# Altium PCB TorpedoSOMDevBoard_v1.1.PcbDoc
Units mil, origin at the board's own origin, x right, y up, seen from the top; angles counter-clockwise.
Board outline 2391 x 3350 mil, 4 copper layers (LT, GND_Plane, POWER, LB), stack 57.51 mil thick; 45 components, 102 nets, 382 pads, 166 vias.
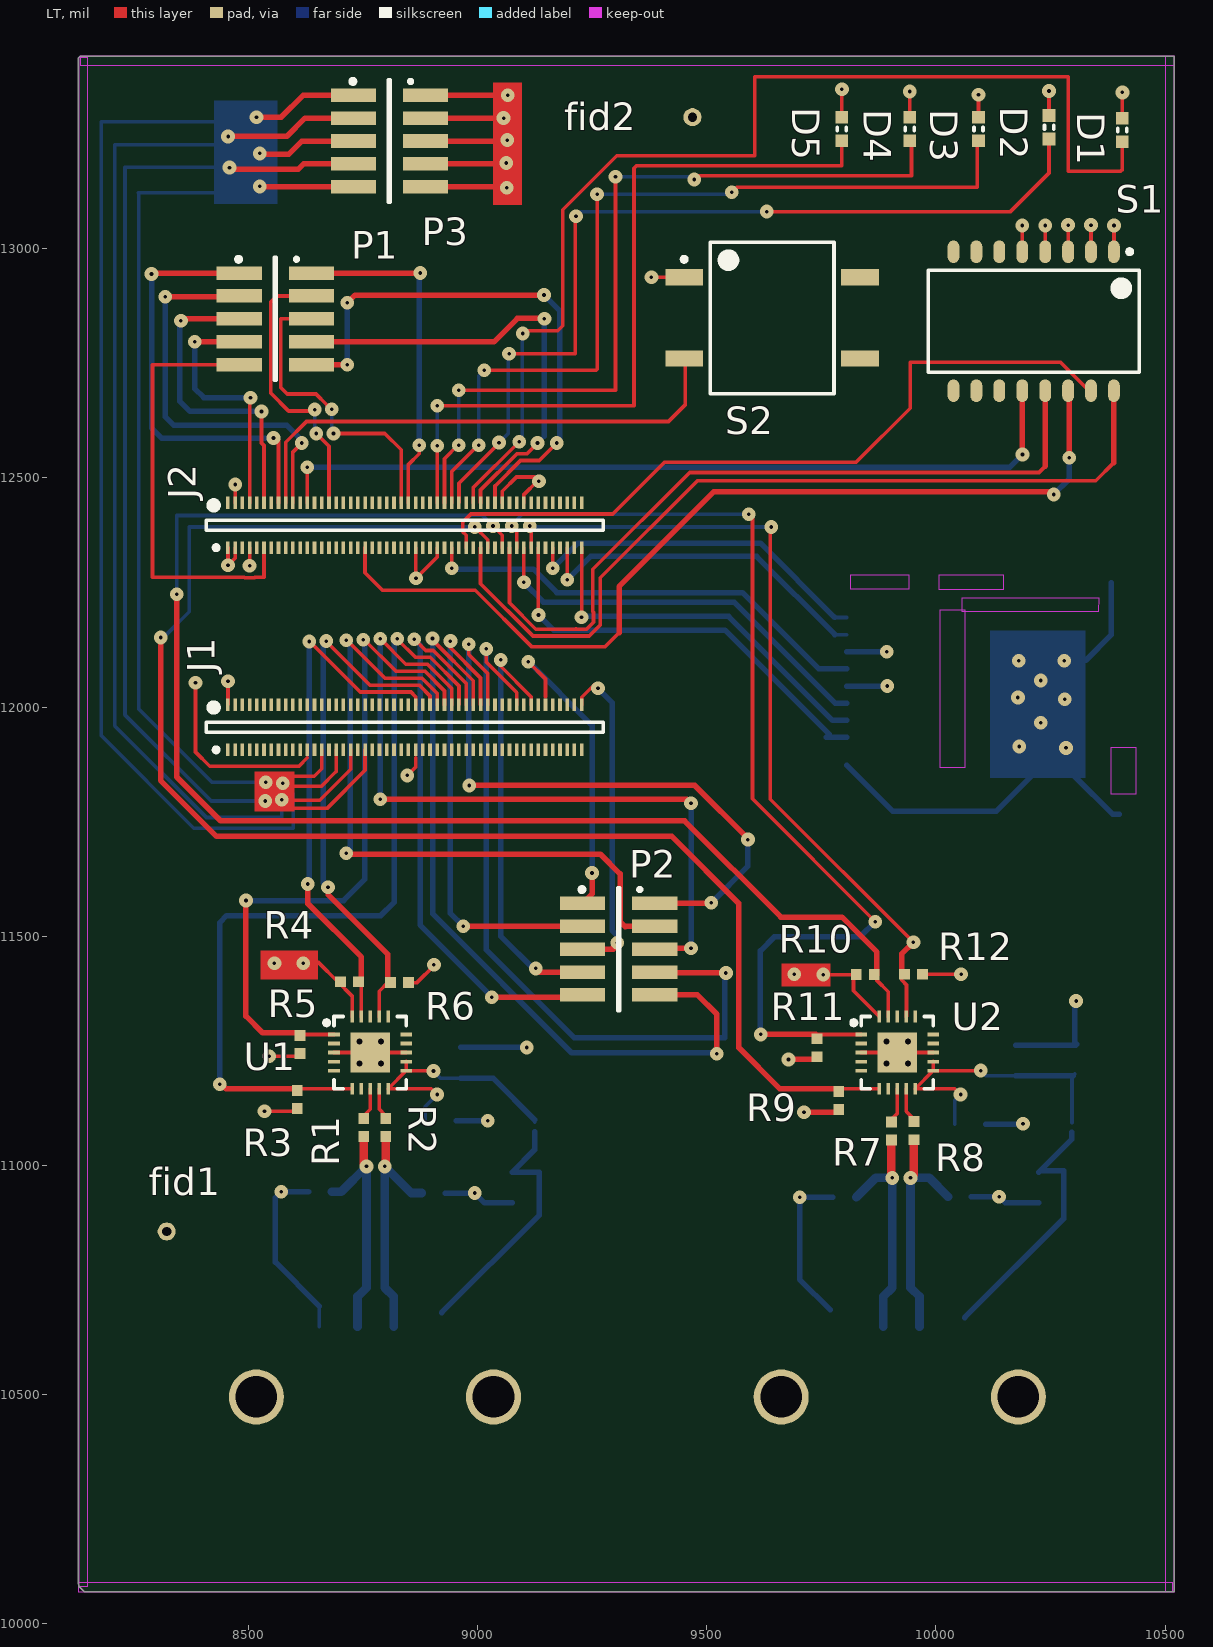
[diagram p0: LT view]
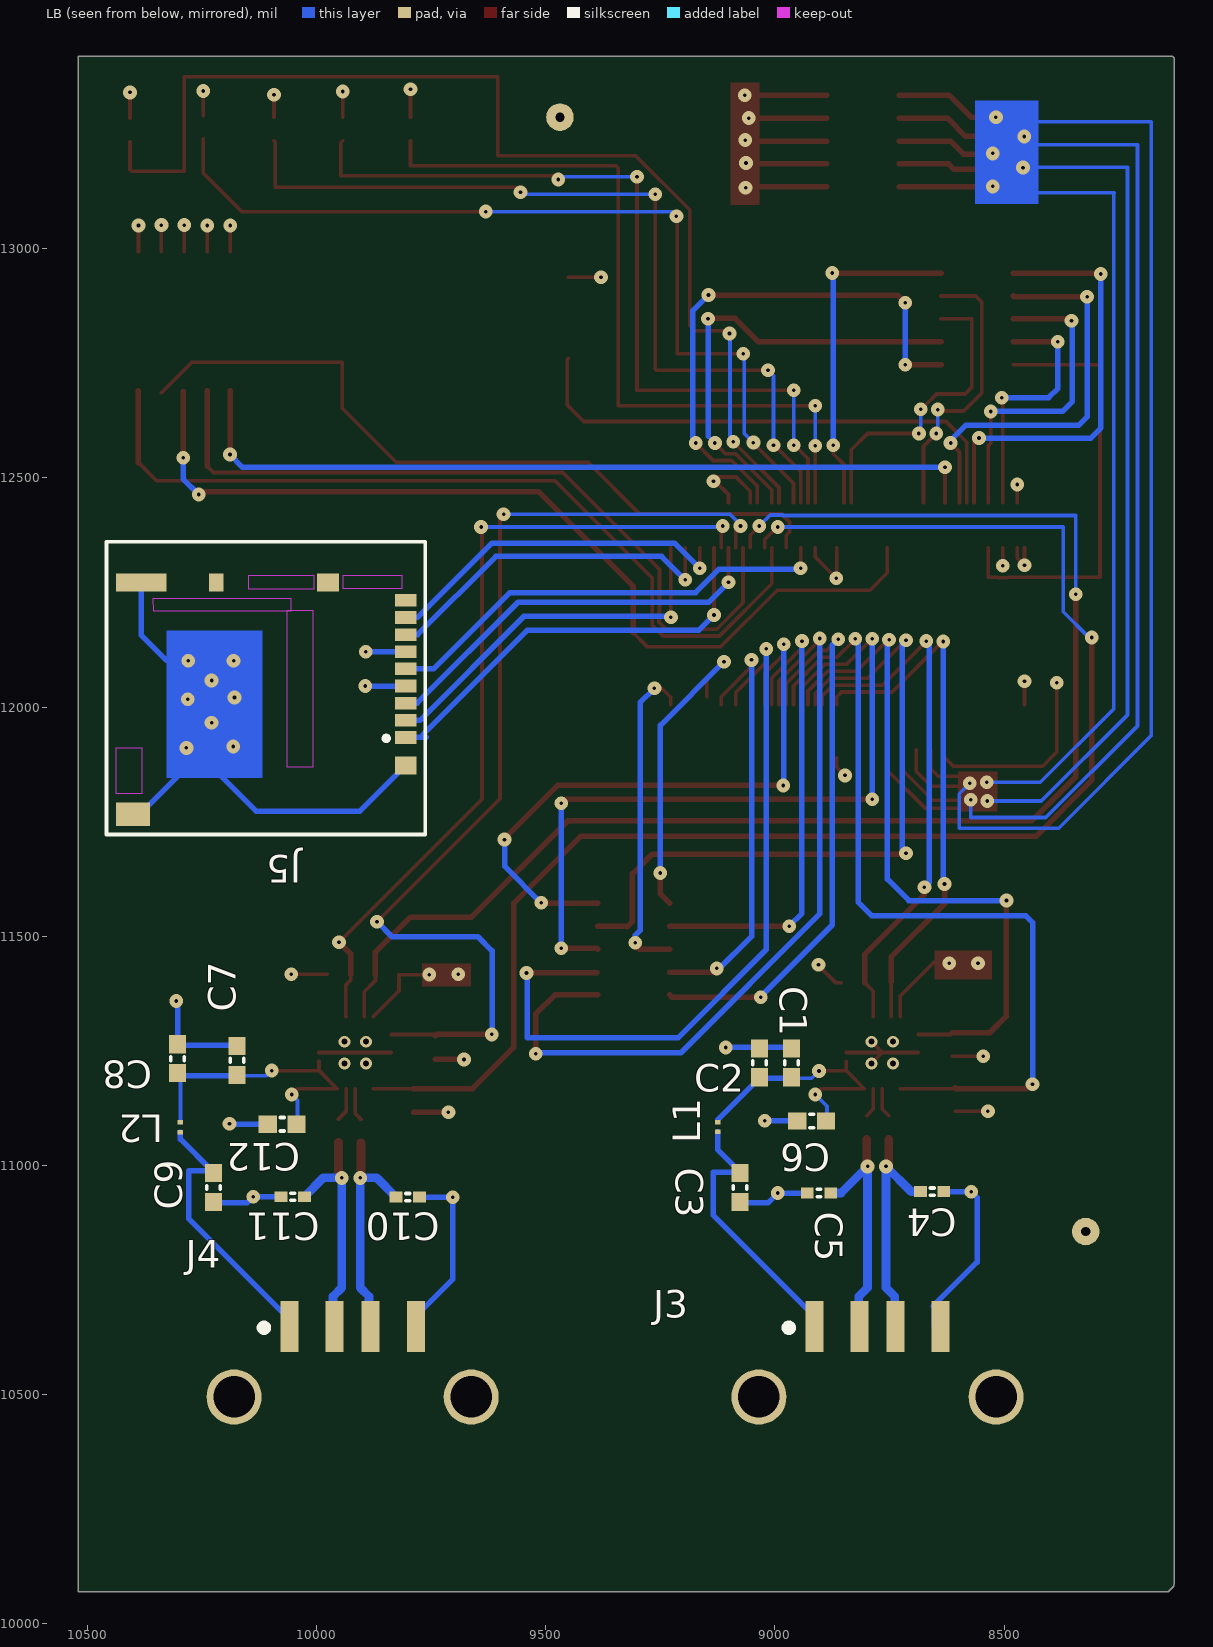
[diagram p1: LB view, seen from below]
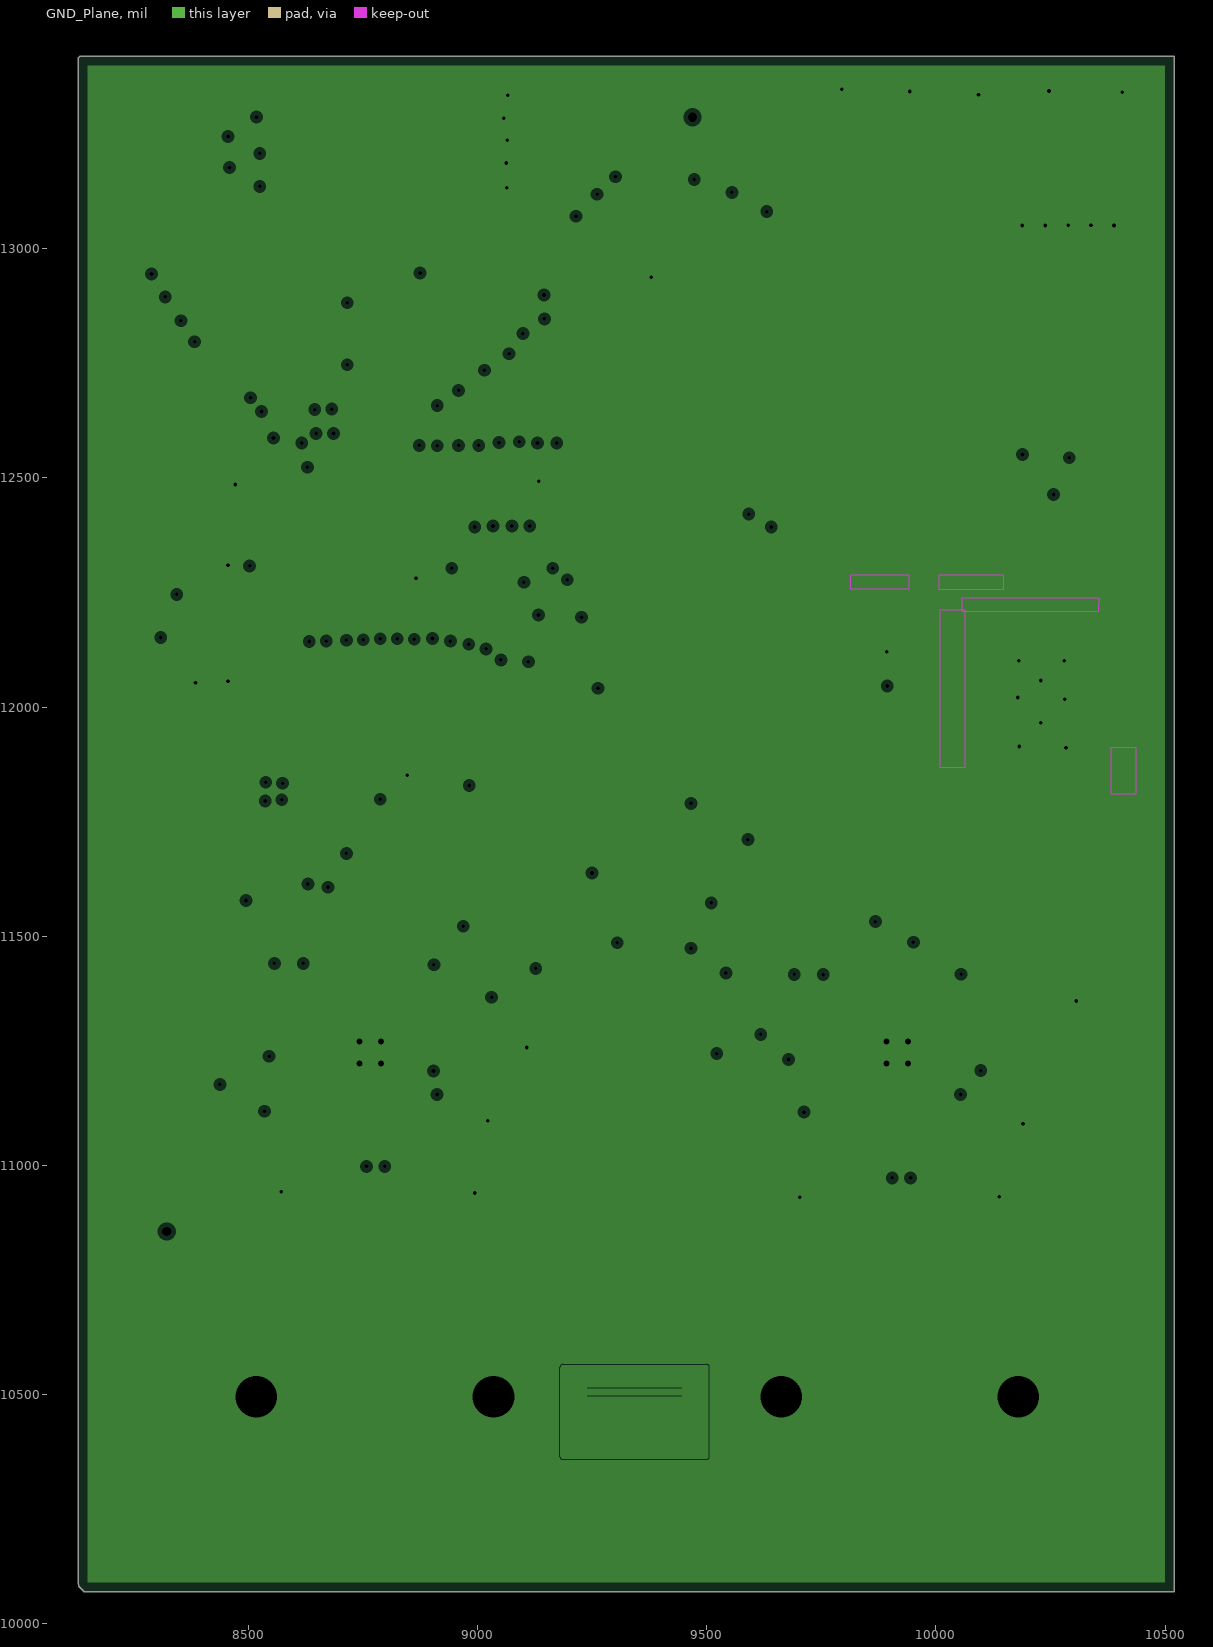
[diagram p2: GND_Plane, clearances drawn from the general rule]
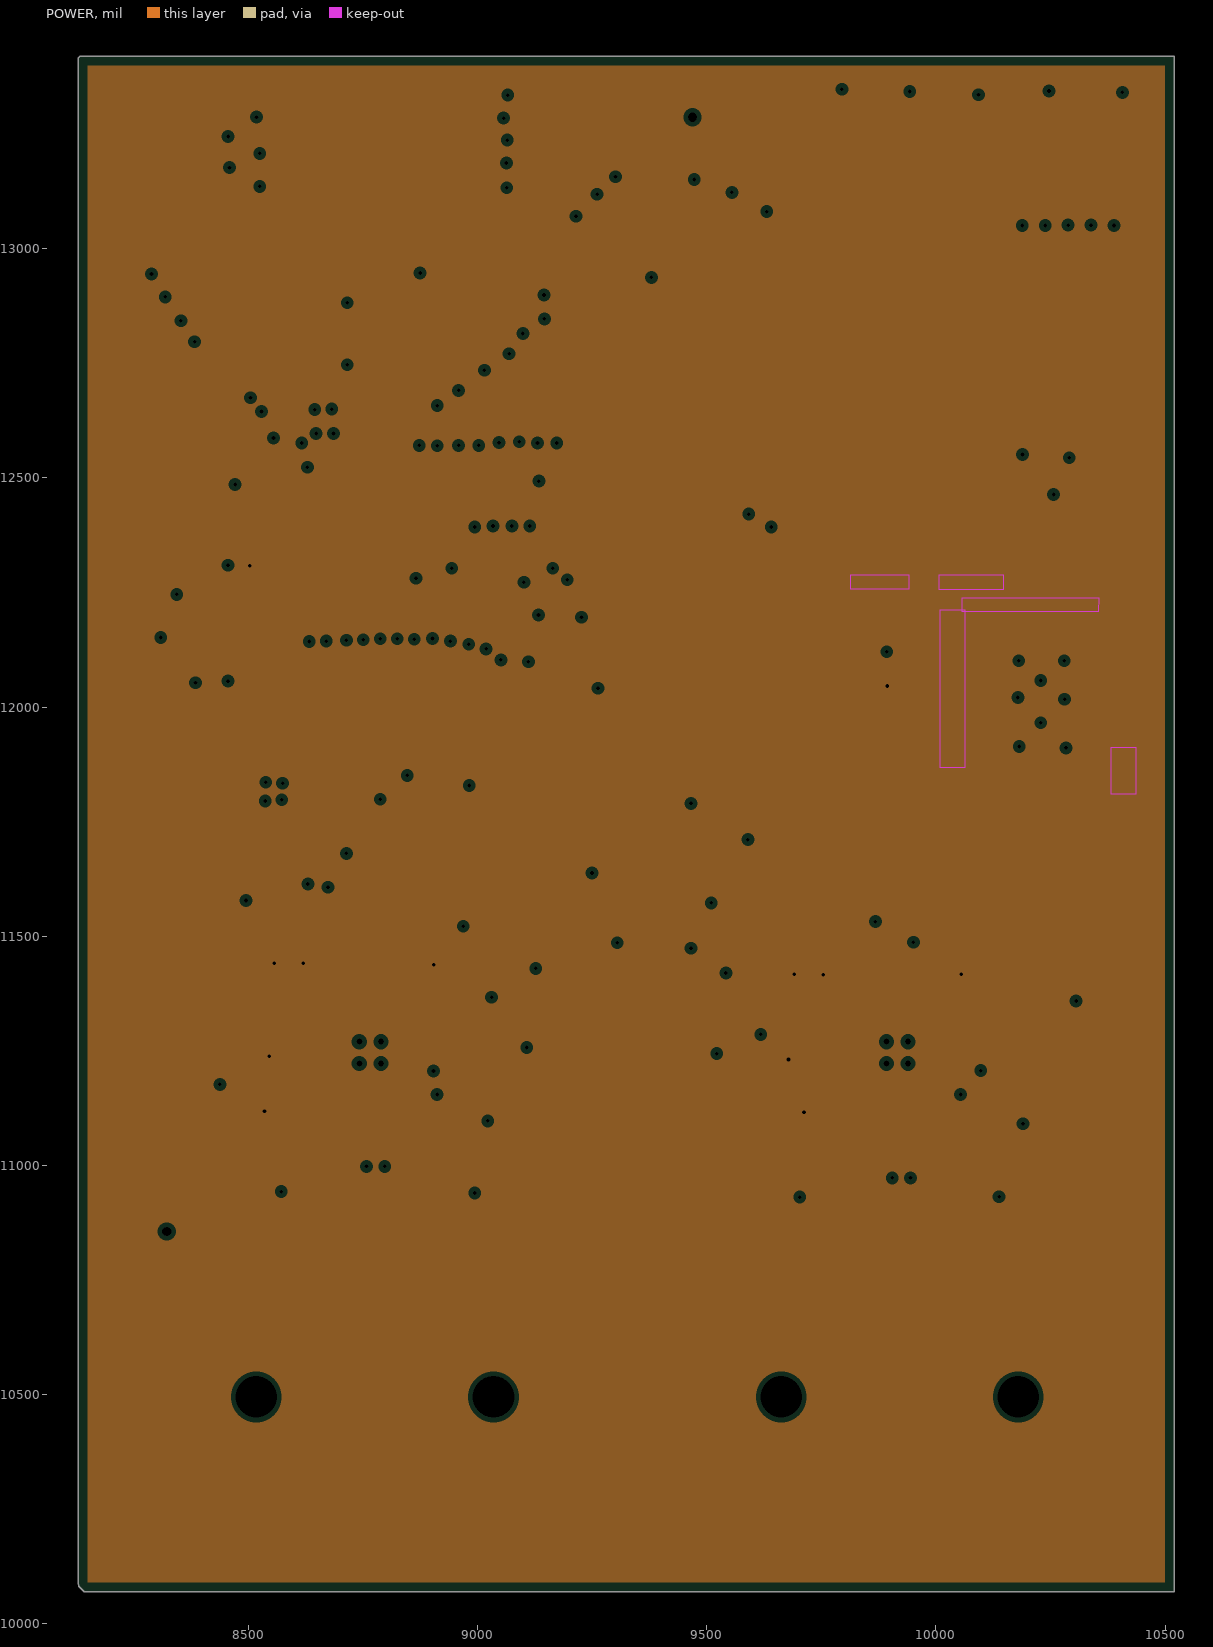
[diagram p3: POWER, clearances drawn from the general rule]

## Layer stack, top to bottom
LT: signal copper 0.59
Dielectric: core 9.37, FR-4, Dk 4.8
GND_Plane: plane copper 15.35, net D_GND
Dielectric: prepreg 6.89, FR-4, Dk 4.8
POWER: plane copper 15.35, net VIO_REF_1V8
Dielectric: core 9.37, FR-4, Dk 4.8
LB: signal copper 0.59

## Board outline
8130,10082 8142,10070 10500,10070 10520,10070 10520,13420 8133,13420 8130,13417 8129,13416 8129,10090

## Design rules (kind name [scope] priority, off if disabled: settings)
AssemblyTestPointUsage [All] p1: valid=2
AssemblyTestpoint [All] p1: testpointundercomponent=TRUE minsize=40 maxsize=130 preferedsize=60 minholesize=0 maxholesize=100 preferedholesize=32 testpointgrid=1 usegrid=TRUE gridtolerance=0.01 allowsidetop=TRUE allowsidebottom=TRUE
Clearance [All] p1: gap=7
DiffPairsRouting [All] p1: maxlimit=10 minlimit=10 mostfreqgap=10 maxuncoupledlength=500
FabricationTestPointUsage [All] p1: valid=0 allowmultiple=TRUE
FabricationTestpoint [All] p1: side=3 testpointundercomponent=TRUE minsize=40 maxsize=130 preferedsize=60 minholesize=0 maxholesize=100 preferedholesize=32 testpointgrid=1 allowsidetop=TRUE allowsidebottom=TRUE usegrid=TRUE gridtolerance=0.01
HoleSize [All] p1: absolutevalues=TRUE maxlimit=100 minlimit=6 maxpercent=80.000 minpercent=20.000
MinimumSolderMaskSliver [All] p1: minsoldermaskwidth=0
PlaneClearance [All] p1: clearance=10
PlaneConnect [All] p1: planeconnectstyle=Direct reliefexpansion=20 reliefentries=4 reliefconductorwidth=15 reliefairgap=10
PolygonConnect [All] p1: connectstyle=Relief reliefconductorwidth=15 reliefentries=4 polygonreliefangle="90 Angle" airgapwidth=10
RoutingVias [All] p1: holewidth=8 width=26 viastyle="Through Hole" minholewidth=6 minwidth=22 maxholewidth=100 maxwidth=130
SilkscreenOverComponentPads [All] p1: minsilkscreentomaskgap=2
SolderMaskExpansion [All] p1: expansion=4
Width Width_1 [All] p1: maxlimit=125 minlimit=8 preferedwidth=12
Width [(InDifferentialPairClass('All Differential Pairs'))] p2: maxlimit=125 minlimit=8 preferedwidth=19
18 further rules are at their usual default settings.

## Classes and differential pairs
component class Fiducials: fid1 fid2
component class USB_UART_Convertors: C1 C2 C3 C4 C5 C6 C7 C8 C9 C10 C11 C12 J3 J4 L1 L2 R1 R2 R3 R4 R5 R6 R7 R8 R9 R10 R11 R12 U1 U2
component class TorpedoSOM_ReceptorS: J1 J2
component class SOM_Resets_BootConfig: S1 S2
component class SD_CARD: J5
component class Onboard_LEDs: D1 D2 D3 D4 D5
component class IO_Connectors: P1 P2 P3
differential pair USB2_D: +USB2_D_P -USB2_D_N
differential pair USB1_D: +USB1_D_P -USB1_D_N

## Components (designator, comment, footprint, x,y, rotation, side; value= is the part's Value field where it differs from the comment)
C1 "C0603" CAP_CER_0603_KEMET 8964,11224 r270 bottom
C2 "C0603" CAP_CER_0603_KEMET 9034,11224 r270 bottom
C3 "C0603" CAP_CER_0603_KEMET 9076,10952 r90 bottom
C4 "C0402" CAP_CER_0402_KEMET 8657,10943 r0 bottom
C5 "C0402" CAP_CER_0402_KEMET 8904,10940 r180 bottom
C6 "C0603" CAP_CER_0603_KEMET 8919.87,11097.4 r180 bottom
C7 "C0603" CAP_CER_0603_KEMET 10173.87,11229.4 r270 bottom
C8 "C0603" CAP_CER_0603_KEMET 10303,11233 r270 bottom
C9 "C0603" CAP_CER_0603_KEMET 10225,10952 r90 bottom
C10 "C0402" CAP_CER_0402_KEMET 9801,10931 r0 bottom
C11 "C0402" CAP_CER_0402_KEMET 10052,10932 r180 bottom
C12 "C0603" CAP_CER_0603_KEMET 10075,11090 r180 bottom
D1 "LED0" LEDCP1006X02N 10407,13259 r90 top
D2 "LED1" LEDCP1006X02N 10247,13265 r90 top
D3 "LED2" LEDCP1006X02N 10093,13261 r90 top
D4 "LED3" LEDCP1006X02N 9943,13261 r90 top
D5 "LED4" LEDCP1006X02N 9795,13261 r90 top
fid1 "Fiducial-1mm" FIDUCIAL_1MM 8322,10856 r90 top
fid2 "Fiducial-1mm" FIDUCIAL_1MM 9469,13287 r90 top
J1 "Connector 100" SOP127P600-8N_100PinConnRecptr_Hirose 8841.46,11956.07 r90 top
J2 "Connector 100" SOP127P600-8N_100PinConnRecptr_Hirose 8841.46,12396.99 r90 top
J3 "USBConn_Assman_AuY1006R" USBConn_Assman_AuY1006R 9035,10495 r180 bottom
J4 "USBConn_Assman_AuY1006R" USBConn_Assman_AuY1006R 10180,10495 r180 bottom
J5 "Hirose_MicroSD_DM3ATSFPEJM5" "SD_Card_Hirose_DM3 AT_SF_PEJM5" 10105,12046 r270 bottom
L1 "FerriteBead_MMZ0603Y152B" Chip2PinSM127P600-8N_FerriteBead_TDK 9125,11084 r90 bottom
L2 "FerriteBead_MMZ0603Y152B" Chip2PinSM127P600-8N_FerriteBead_TDK 10297,11083 r90 bottom
P1 "SOP127P600-8N_Header_10PIN_Harwin" SOP127P600-8N_Header_10PIN_Harwin 8559,12847 r0 top
P2 "SOP127P600-8N_Header_10PIN_Harwin" SOP127P600-8N_Header_10PIN_Harwin 9308,11472 r0 top
P3 "SOP127P600-8N_Header_10PIN_Harwin" SOP127P600-8N_Header_10PIN_Harwin 8808,13235 r0 top
R1 "27R" RES_CHIP_0402 8752,11083 r270 top
R2 "27R" RES_CHIP_0402 8800,11083 r270 top
R3 "10K" RES_CHIP_0402 8607,11144 r270 top
R4 "10K" RES_CHIP_0402 8721,11401 r180 top
R5 "10K" RES_CHIP_0402 8613,11264 r270 top
R6 "10K" RES_CHIP_0402 8830,11399 r0 top
R7 "27R" RES_CHIP_0402 9903,11075 r270 top
R8 "27R" RES_CHIP_0402 9952,11076 r270 top
R9 "10K" RES_CHIP_0402 9788,11142 r270 top
R10 "10K" RES_CHIP_0402 9845.87,11416.4 r180 top
R11 "10K" RES_CHIP_0402 9741,11257 r270 top
R12 "10K" RES_CHIP_0402 9951,11417.12 r0 top
S1 "DipSwitch_Copal_CHS-08TB" SOP127P800X250-16N_DIP_SWITCH_COPAL 10213.51,12841.87 r270 top
S2 "CnK_PushButton_1.14100.5030000" SOP127P600-8N_PushButtonRacon8 9643,12849 r0 top
U1 "FT231X" QFN127P600-8N_FTDI_20PIN 8765.87,11246.4 r0 top
U2 "FT231X" QFN127P600-8N_FTDI_20PIN 9915.87,11246.4 r0 top

## Footprints (in the part's own frame and the unit in brackets; to place one, negate y for a bottom-side part, rotate by r counter-clockwise, add the part's x,y. Pads: shape width x height; smd on the part's side, far side on the other; paste and mask are expansions set on the pad)
CAP_CER_0402_KEMET [mm] "Chip Capacitor, 2-Leads, Body 1.0x0.5mm, IPC Medium Density"
  rect 0.7x0.6 smd: 1(-0.65,0) 2(0.65,0)
  silkscreen extent -0.1,-0.2 0.1,0.2, body extent -0.5,-0.25 0.5,0.25, height 0.5
CAP_CER_0603_KEMET [mm]
  rect 1x0.95 smd: 1(-0.8,0) 2(0.8,0)
  silkscreen extent -0.1,-0.38 0.1,0.38, body extent -0.81,-0.4 0.79,0.4, height 0.3
Chip2PinSM127P600-8N_FerriteBead_TDK [mm] "Chip2PinSM127P600-8N_FerriteBead_TDK"
  rect 0.25x0.3 smd: 1(-0.275,0) 2(0.275,0)
  body extent -0.32,-0.17 0.31,0.17, height 0.2
FIDUCIAL_1MM [mm] "1mm Fiducial"
  round 1 / inner round 1.524 / far side round 1.524 hole 0.508 paste-1 mask+0.5: 1(0,0)
  body extent -0.5,-0.5 0.5,0.5, height 0.02
LEDCP1006X02N [mm] "LEDCP1006X02N_Chip LED, 2-Leads, Body 1.0x0.6mm, IPC Medium Density"
  rect 0.7x0.7 smd: 1(-0.65,0) 2(0.65,0)
  silkscreen extent -0.1,-0.25 0.1,0.25, body extent -0.5,-0.3 0.5,0.3, height 0.2
QFN127P600-8N_FTDI_20PIN [mm] "QFN127P600-8N_FTDI_20PIN"
  rect 0.65x0.2 smd: 1(-2,1) 2(-2,0.5) 3(-2,0) 4(-2,-0.5) 5(-2,-1) 11(2,-1) 12(2,-0.5) 13(2,0) 14(2,0.5) 15(2,1)
  rect 0.2x0.65 smd: 6(-1,-2) 7(-0.5,-2) 8(0,-2) 9(0.5,-2) 10(1,-2) 16(1,2) 17(0.5,2) 18(0,2) 19(-0.5,2) 20(-1,2)
  rect 2.2x2.2 smd: 21(0,0)
  silkscreen extent -2.54,-2 2,2, body extent -2,-2 2,2, height 0.8
RES_CHIP_0402 [mm] "Chip Resistor, Body 1.1x0.5mm, IPC High Density"
  rect 0.6x0.6 smd: 1(-0.5,0) 2(0.5,0)
  body extent -0.5,-0.25 0.5,0.25, height 0.35
"SD_Card_Hirose_DM3 AT_SF_PEJM5" [mm]
  rect 0.7x1.2 smd: 1(2.85,7.6) 2(1.9,7.6) 3(0.95,7.6) 4(0,7.6) 5(-0.95,7.6) 6(-1.9,7.6) 7(-2.85,7.6) 8(-3.8,7.6) ""(-4.75,7.6)
  rect 1x2.8 smd: 6(-5.725,-7.05)
  rect 1.3x1.9 smd: 6(7.1,-7.5)
  rect 1x1.2 smd: 9(4.4,7.6) ""(-5.725,3.3)
  rect 1x0.8 smd: ""(-5.725,-2.9)
  Keep-Out Layer region: 3.425,-7.025 5.975,-7.025 5.975,-8.425 3.425,-8.425
  Keep-Out Layer region: -4.2,2.457 4.5,2.443 4.5,1.043 -4.2,1.043
  Keep-Out Layer region: -4.85,-6.388 -4.85,1.238 -4.15,1.238 -4.15,-6.362
  Keep-Out Layer region: -6.125,-1.1 -6.125,2.5 -5.375,2.5 -5.375,-1.1
  Keep-Out Layer region: -6.15,4.15 -6.15,7.4 -5.4,7.4 -5.4,4.15
  silkscreen extent -8,-8.98 8.23,8.7, body extent -8.45,-9.43 8.6,9, height 1.72
SOP127P600-8N_100PinConnRecptr_Hirose [mm] "SOP127P600-8N_100PinConnRecptr_Hirose"
  rect 0.7x0.2 smd: 1(-1.25,9.8) 2(-1.25,9.4) 3(-1.25,9) 4(-1.25,8.6) 5(-1.25,8.2) 6(-1.25,7.8) 7(-1.25,7.4) 8(-1.25,7) 9(-1.25,6.6) 10(-1.25,6.2) 11(-1.25,5.8) 12(-1.25,5.4) 13(-1.25,5) 14(-1.25,4.6) 15(-1.25,4.2) 16(-1.25,3.8) 17(-1.25,3.4) 18(-1.25,3) 19(-1.25,2.6) 20(-1.25,2.2) 21(-1.25,1.8) 22(-1.25,1.4) 23(-1.25,1) 24(-1.25,0.6) 25(-1.25,0.2) 26(-1.25,-0.2) 27(-1.25,-0.6) 28(-1.25,-1) 29(-1.25,-1.4) 30(-1.25,-1.8) 31(-1.25,-2.2) 32(-1.25,-2.6) 33(-1.25,-3) 34(-1.25,-3.4) 35(-1.25,-3.8) 36(-1.25,-4.2) 37(-1.25,-4.6) 38(-1.25,-5) 39(-1.25,-5.4) 40(-1.25,-5.8) 41(-1.25,-6.2) 42(-1.25,-6.6) 43(-1.25,-7) 44(-1.25,-7.4) 45(-1.25,-7.8) 46(-1.25,-8.2) 47(-1.25,-8.6) 48(-1.25,-9) 49(-1.25,-9.4) 50(-1.25,-9.8) 51(1.25,-9.8) 52(1.25,-9.4) 53(1.25,-9) 54(1.25,-8.6) 55(1.25,-8.2) 56(1.25,-7.8) 57(1.25,-7.4) 58(1.25,-7) 59(1.25,-6.6) 60(1.25,-6.2) 61(1.25,-5.8) 62(1.25,-5.4) 63(1.25,-5) 64(1.25,-4.6) 65(1.25,-4.2) 66(1.25,-3.8) 67(1.25,-3.4) 68(1.25,-3) 69(1.25,-2.6) 70(1.25,-2.2) 71(1.25,-1.8) 72(1.25,-1.4) 73(1.25,-1) 74(1.25,-0.6) 75(1.25,-0.2) 76(1.25,0.2) 77(1.25,0.6) 78(1.25,1) 79(1.25,1.4) 80(1.25,1.8) 81(1.25,2.2) 82(1.25,2.6) 83(1.25,3) 84(1.25,3.4) 85(1.25,3.8) 86(1.25,4.2) 87(1.25,4.6) 88(1.25,5) 89(1.25,5.4) 90(1.25,5.8) 91(1.25,6.2) 92(1.25,6.6) 93(1.25,7) 94(1.25,7.4) 95(1.25,7.8) 96(1.25,8.2) 97(1.25,8.6) 98(1.25,9) 99(1.25,9.4) 100(1.25,9.8)
  silkscreen extent -1.37,-11 1.3,11, body extent -1.47,-11 1.47,11, height 2.55
SOP127P600-8N_Header_10PIN_Harwin [mm] "SOP127P600-8N_Header_10PIN_Harwin"
  rect 2.5x0.75 smd: 1(-2,2.54) 2(-2,1.27) 3(-2,0) 4(-2,-1.27) 5(-2,-2.54) 6(2,-2.54) 7(2,-1.27) 8(2,0) 9(2,1.27) 10(2,2.54)
  silkscreen extent -2.15,-3.4 1.27,3.43, body extent -1.8,-3.42 1.8,3.42, height 4.88
SOP127P600-8N_PushButtonRacon8 [mm] "SOP127P600-8N_PushButtonRacon8"
  rect 2.1x0.9 smd: 1(-4.875,2.25) 2(-4.875,-2.25) 3(4.875,-2.25) 4(4.875,2.25)
  silkscreen extent -5,-4.2 3.43,4.2, body extent -4.2,-4.2 4.2,4.2, height 5.11
SOP127P800X250-16N_DIP_SWITCH_COPAL [mm] "SOP, 16-Leads, Body 11.7x5.0mm (max), Pitch 1.27mm, IPC Medium Density"
  oval 1.25x0.65 smd: 1(-3.85,4.445) 2(-3.85,3.175) 3(-3.85,1.905) 4(-3.85,0.635) 5(-3.85,-0.635) 6(-3.85,-1.905) 7(-3.85,-3.175) 8(-3.85,-4.445) 9(3.85,-4.445) 10(3.85,-3.175) 11(3.85,-1.905) 12(3.85,-0.635) 13(3.85,0.635) 14(3.85,1.905) 15(3.85,3.175) 16(3.85,4.445)
  silkscreen extent -3.97,-5.85 2.83,5.85, body extent -2.5,-5.85 2.5,5.85, height 2.5
USBConn_Assman_AuY1006R [mm]
  rect 1x2.84 smd paste+0.254 mask+0.254: 1(3.073,3.9) 2(5.57,3.9) 3(7.57,3.9) 4(10.07,3.9)
  round 3.048 hole 2.3: 5(0,0) 6(13.14,0)
  silkscreen extent 1.45,3.64 1.85,4.04

## Part data
C1 C2 C3 C4 C5 C6 C7 C8 C9 C10 C11 C12: "Ceramic Chip Capacitor - Standard"
D1: "Typical INFRARED GaAs LED"
D2 D3 D4 D5: library part LED0, "Typical INFRARED GaAs LED"
J1 J2: "Receptacle Header Assemby"
J3 J4: library part 1-353576-1, "USB 1.1, Right Angle, SMT, A Type, Receptacle, 4 Position, White"
J5: library part Component_1
L1 L2: library part Inductor, "Inductor"
P1 P2 P3: library part "Header 10", "Header, 10-Pin"
R1 R2 R3 R4 R5 R6 R7 R8 R9 R10 R11 R12: library part ERJ2GE, "Thick Film Chip Resistor, 1 Ohm to 2.2M Ohm Range, 5% Tolerance, 0402 Size, 0.063 W"
S1: library part A6H-8102-P, "Ultra-Low Profile, Half-Pitch, SM, Slide DIP Switch, Flat Actuator, White Striker, 8 Position, SPST, Seal Tape: Embossed Taping Model"
S2: library part KSS222GLFG, "Switch, Subminiature Side-Actuated Tact, SMT, KSS Series, Std Actuator, 2 Gull Wing Leads, SPST, 2N Force, Gold Contact"

## Via types
v1: diameter 30, hole 8, LT to LB, 158 vias
v2: diameter 25.98, hole 12.99, LT to LB, tented top, 8 vias

## Nets (pads, with @x,y where several pads share a name; then routed paths per layer and width w, separated by ;. In a path a pad name is that pad's centre, name@x,y a point inside that pad or via, vN(x,y) a via of type N, cw(c..) or ccw(c..) an arc to the next point about the centre after c; other vN are vias at no path point)
CPU_GPIO_82: D4.1 J2.70 | length 1800.2
  LT w8: J2.70 8928.08,12542.08 8957,12571 v1(8959,12571) ; v1(8959,12691) 9301,12691 v1(9301,13157) ; v1(9473,13151) 9481,13159 9947,13159 9947,13231.41 D4.1
  LB w8: v1(8959,12571) v1(8959,12691) ; v1(9301,13157) 9473,13157 v1(9473,13151)
CPU_GPIO_83: D2.1 J2.68 | length 1960.3
  LT w8: J2.68 8959.57,12488.43 9047,12575.85 v1(9047,12577) ; v1(9069,12771) 9213,12771 9213,13069 v1(9215,13071) ; v1(9631,13081) 10163,13081 10247,13165 D2.1
  LB w8: v1(9047,12577) 9067,12597 9067,12769 v1(9069,12771) ; v1(9215,13071) 9225,13081 v1(9631,13081)
CPU_GPIO_84: D1.1 J2.66 | length 2471.7
  LT w8: J2.66 8991.07,12479.07 9089,12577 9089,12579 v1(9091,12579) ; v1(9099,12815) 9105,12821 9175,12821 9186,12832 9186,13085.01 9303.99,13203 9605,13203 9605,13375 10289,13375 10289,13169 10403,13169 10407,13173 D1.1
  LB w8: v1(9091,12579) 9098,12586 9098,12814 v1(9099,12815)
CPU_GPIO_94: J2.63 P1.6 | length 1200.8
  LT w8: J2.63 9038.32,12482.32 ; 9039.13,12483.13 9094,12538 9135,12538 v1(9173,12576)
  LT w12: P1.6 v1(8716,12747) ; v1(8716,12882) 8733,12899 v1(9145,12899)
  LB w12: v1(8716,12747) v1(8716,12882) ; v1(9145,12899) 9179,12865 9179,12576 v1(9173,12576)
CPU_GPIO_95: J2.65 P1.7 | length 1001.6
  LT w8: J2.65 9006.82,12473.61 9086.21,12553 9108,12553 v1(9131,12576)
  LT w12: P1.7 9036,12797 9087,12848 v1@9147,12848
  LB w8: v1(9131,12576) 9146,12591
  LB w12: 9146,12591 v1(9146,12847)
CPU_GPIO_96: D5.1 J2.71 | length 1668.8
  LT w8: J2.71 v1(8912.33,12570.33) ; v1(8912.33,12657.67) 9341.67,12657.67 9341.67,13175.67 9347,13181 9583,13181 9795,13181 D5.1
  LB w8: v1(8912.33,12570.33) v1(8912.33,12657.67)
CPU_GPIO_111: D3.1 J2.69 | length 1888.7
  LT w8: J2.69 8943.83,12513.83 9001,12571 v1(9003,12571) ; v1(9015,12735) 9259,12735 9261,12737 v1(9261,13119) ; v1(9555,13123) 9565.83,13133.83 10090.17,13133.83 10090.17,13232.58 D3.1
  LB w8: v1(9003,12571) 9003,12723 v1(9015,12735) ; v1(9261,13119) 9555,13119 v1(9555,13123)
CPU_GPIO_144: J2.76 P1.8 | length 681.6
  LT w8: P1.8 8571,12847 8571,12697 8585,12683 8647.77,12683 8671,12659.77 8671,12659 8680,12650 v1(8682,12650) ; v1(8686,12597) 8798,12597 8833.59,12561.41 J2.76
  LB w8: v1(8682,12650) 8682,12598 8683,12597 v1(8686,12597)
CPU_GPIO_147: J2.86 P1.9 | length 623.4
  LT w8: P1.9 8562,12897 8549,12884 8549,12685 8588,12646 8644,12646 8645,12647 v1(8645,12649) ; v1(8648.09,12597) 8676.11,12568.98 J2.86
  LB w8: v1(8645,12649) 8645,12600.09 v1(8648.09,12597)
CPU_GPIO_158: J2.75 P1.10 | length 747.9
  LT w8: J2.75 8849.34,12529.34 8873,12553 v1(8873,12571)
  LT w12: P1.10 v1(8875,12947)
  LB w12: v1(8873,12571) v1@8873,12947
D_GND: C1.1 C2.1 C3.1 C4.1 C5.1 C6.1 C7.1 C8.1 C9.1 C10.1 C11.1 C12.1 D1.2 D2.2 D3.2 D4.2 D5.2 J1.12 J1.27 J1.100 J2.1 J2.2 J2.27 J2.30 J2.59 J2.62 J2.99 J3.4 J3.5 J3.6 J4.4 J4.5 J4.6 J5.6 J5.9 P3.6 P3.7 P3.8 P3.9 P3.10 S1.1 S1.2 S1.3 S1.4 S1.5 S2.1 U1.3 U1.13 U1.21 U2.3 U2.13 U2.21 | length 5361
  LT w8: v1(8385,12053) 8385,11902 8416,11871 8610.53,11871 8628.87,11889.34 ; J1.100 v1(8455.64,12056.64) ; J2.1 v1(8455.64,12309.36) 8471.39,12325.11 J2.2 ; J2.99 v1(8471.39,12485.61) ; U1.3 U1.21 ; v2(8789.5,11222.78) U1.21 ; v2(8789.5,11270.02) U1.21 ; U1.13 U1.21 ; v1(8847,11851) 8865.09,11869.09 8865.09,11889.34 ; J2.27 8865.09,12281.91 v1(8866,12281) 8912.33,12327.33 J2.30 ; J2.62 9054.06,12471.06 9085,12502 9125,12502 v1(9134,12493) 9130.58,12493 9101.31,12463.73 J2.59 ; v1(9379.42,12937.58) S2.1 ; D5.2 v1(9795,13348) ; U2.3 U2.21 U2.13 ; D4.2 v1(9943,13343) ; D3.2 v1(10093,13336) ; S1.5 v1(10188.51,13050.49) ; S1.4 v1(10238.51,13050.49) ; D2.2 v1(10247,13344) ; S1.3 v1(10288.51,13051.51) ; S1.2 v1(10338.51,13051.49) ; S1.1 v1(10388.51,13050.49) ; D1.2 v1(10407,13341)
  LT w12: P3.6 9062,13135 v1(9064,13133) ; P3.7 9061,13185 v1(9063,13187) ; P3.8 9063,13235 v1(9065,13237) ; P3.9 v1(9057,13285) ; P3.10 v1(9066,13335) ; v1(9022.4,11097.4) v1@9023,11098
  LB w8: J3.4@8654.78,10648 J3.4@8654.78,10693.22
  LB w12: C4.1 v1(8572,10943) 8559,10930 8559,10789 J3.4@8654.78,10693.22 ; C5.1 v1(8994,10940) 9015.46,10918.54 C3.1@9076,10918.54 ; C6.1@8953.34,11097.4 v1(9022.4,11097.4) ; C1.1@8964,11257.46 9034,11257.46 v1(9107.54,11257.46) ; J4.4@9769.89,10684.89 9703,10751.78 v1(9703,10931) C10.1 ; J5.9 9905.56,11773 10132,11773 10225,11866 ; J5.6@9805.79,12120.8 v1(9892.8,12120.8) ; C11.1 v1(10138,10932) 10151.46,10918.54 C9.1@10225,10918.54 ; C12.1@10108.46,11090 10190,11090 v1(10190,11091) ; C7.1@10173.87,11262.87 10305.4,11262.87 C8.1@10307,11264.46 ; C8.1@10303,11266.46 10303,11356 v1(10306,11359) ; 10303,11849 10385.53,11766.47 J5.6@10400.28,11766.47 ; 10327,12102 10382.56,12157.56 J5.6@10382.56,12271.39
  other v1: 10284,11911 10182,11914 10229,11966 10281,12017 10179,12021 10229,12058 10181,12101 10280,12101
  other v2: 8742.25,11222.78 9892.25,11222.78 9939.5,11222.78 8742.25,11270.02 9892.25,11270.02 9939.5,11270.02
I2C1_SCL: J2.95 P1.3 | length 688.2
  LT w8: v1(8529,12645) 8529,12576.23 8534.38,12570.85 J2.95
  LT w12: v1@8357,12847 P1.3
  LB w8: v1@8351,12841 v1(8353,12843)
  LB w12: v1@8351,12841 8351,12667 8373,12645 v1(8529,12645)
I2C1_SDA: J2.97 P1.4 | length 559.2
  LT w8: J2.97 8502.88,12672.88 v1(8505,12675)
  LT w12: v1(8383,12797) P1.4
  LB w12: v1(8383,12797) 8383,12695 8403,12675 v1(8505,12675)
I2C2_SCL: J2.93 P1.1 | length 952
  LT w8: v1(8289,12945) v1@8291,12947 ; v1(8555,12587) 8561,12587 8565.87,12582.13 J2.93
  LT w12: v1@8291,12947 P1.1
  LB w12: v1(8289,12945) 8289,12609 8311,12587 v1(8555,12587)
I2C2_SDA: J2.91 P1.2 | length 890.2
  LT w8: J2.91 8597.37,12556.6 v1(8616.77,12576)
  LT w12: v1(8319,12895) 8478.26,12895 P1.2
  LB w8: v1(8616.77,12576) 8619,12578.23 v1@8620.23,12578.23
  LB w12: v1(8319,12895) 8319,12633 8337,12615 8583.46,12615 v1@8620.23,12578.23
MAIN_BATT_3V6: J1.14 J1.16 J1.18 J1.20 P3.1 P3.2 P3.3 P3.4 P3.5 | length 9713
  LT w8: 8558,11840 v1@8566,11832 ; 8559,11825 8587,11797 8656,11797 8723.35,11864.35 J1.18 ; 8560,11811 v1(8573,11798) 8592,11779 8671.7,11779 8754.85,11862.15 J1.20 ; 8560,11856 8575,11841 v1(8575,11834) ; v1@8575,11827 8659,11827 8691,11859 8691.86,11859 J1.16 ; 8575,11849 8644,11849 8660.36,11865.36 J1.14
  LT w12: v1(8456,13245) 8584,13245 8624,13285 P3.2 ; v1(8459,13177) 8463,13173 8609,13173 8621,13185 P3.4 ; v1(8518,13287) 8572,13287 8620,13335 P3.1 ; v1(8525,13136) 8526,13135 P3.5 ; v1(8525,13208) 8527,13206 8588,13206 8617,13235 P3.3
  LB w8: 8433,13178 8231,13178 8231,11983 8419,11795 v1(8537,11795) ; 8433,13227 8209,13227 8209,11959 8409,11759 8573,11759 v1(8573,11798) ; 8434,13277 8179,13277 8179,11938 8381,11736 8598,11736 8598,11811 v1(8575,11834) ; 8436,13122 8260,13122 8261,13121 8261,11996 8421,11836 v1(8538,11836)
MCSP1_SIMO: J1.66 P2.6 | length 1769.4
  LT w8: v1(8902,12149.54) 8902,12144.67 8908.14,12138.54 8909.69,12138.54 8991,12057.23 8991,12005.36 J1.66
  LT w12: P2.6 9387.74,11373 9479,11373 9522,11330 v1(9522,11244)
  LB w12: v1(8902,12149.54) 8902,11549.4 9205.4,11246 9522,11246 v1(9522,11244)
MCSPI1_CLK: J1.64 P2.10 | length 1411
  LT w8: v1(8981,12137) 8981,12115.02 9022.57,12073.45 J1.64
  LT w12: v1(8982,11829) 9474,11829 9591,11712 v1(9590,11711) ; P2.10 9509,11572 v1(9510,11573)
  LB w12: v1(8981,12137) 8981,11830 v1(8982,11829) ; v1(9510,11573) 9590,11653 v1(9590,11711)
MCSPI1_CS0: J1.71 P2.9 | length 1543
  LT w8: v1(8714,12146) 8715.23,12146 8798.23,12063 8879.16,12063 8912.33,12029.83 J1.71
  LT w12: v1(8714,11681) 8716,11679 9268,11679 9311,11636 9311,11532 9322,11521 9323,11522 P2.9
  LB w12: v1(8714,11681) 8722,11689 8722,12138 v1(8714,12146)
MCSPI1_CS1: J1.69 P2.8 | length 1664
  LT w8: v1(8788,12149) 8788.23,12149 8843.69,12093.54 8891.05,12093.54 8943.83,12040.76 J1.69
  LT w12: v1(8788,11799) 9457,11799 v1(9466,11790) ; P2.8 9388.74,11474 v1(9466,11474)
  LB w12: v1(8788,11799) v1(8788,12149) ; v1(9466,11474) v1(9466,11790)
MCSPI1_SOMI: J1.60 P2.7 | length 1705
  LT w8: v1(9019,12127) 9019,12098.23 9085.56,12031.67 J1.60 ; P2.7 P2.7@9388.74,11420
  LT w12: P2.7@9388.74,11420 v1(9542,11420)
  LB w8: v1@9540,11420 v1(9542,11420)
  LB w12: v1(9019,12127) 9019,11470.87 9210.87,11279 9540,11279 v1@9540,11420
MCSPI2_CLK: J1.67 P2.5 | length 1252.4
  LT w8: v1(8862,12148) 8862,12149 8887.46,12123.54 8903.48,12123.54 8975.32,12051.69 J1.67
  LT w12: v1(9031,11367) 9224.26,11367 P2.5
  LB w12: v1(8862,12148) 8875,12135 8875,11525 9031,11369 v1(9031,11367)
MCSPI2_CS0: J1.58 P2.4 | length 941.1
  LT w8: v1(9051,12103) 9051,12088.87 9117.06,12022.81 J1.58
  LT w12: v1(9127,11430) 9135,11422 P2.4
  LB w8: v1@9124,11427 v1(9127,11430)
  LB w12: v1(9051,12103) 9051,11500 v1@9124,11427
MCSPI2_CS1: J1.51 P2.3 | length 723.4
  LT w8: J1.51 9227.29,12021.29 9255,12049 v1(9263,12041)
  LT w12: P2.3 9296,11472 9296,11477 v1(9305,11486)
  LB w12: v1(9263,12041) 9294,12010 9294,11513 9305,11502 v1(9305,11486)
MCSPI2_SIMO: J1.65 P2.2 | length 1061.5
  LT w8: v1(8941,12144) 8939,12142 8939,12131.49 9006.82,12063.67 J1.65
  LT w12: v1(8969,11522) P2.2
  LB w12: v1(8941,12144) 8941,11550 v1(8969,11522)
MCSPI2_SOMI: J1.56 P2.1 | length 684.9
  LT w8: v1(9111,12099) 9148.55,12061.45 9148.55,12022.81
  LT w12: P2.1 9250,11592.74 v1(9250,11638)
  LB w12: v1(9111,12099) 9250,11960 v1(9250,11638)
NetC1_2: C1.2 C2.2 C6.2 L1.2 U1.10 U1.11 U1.12 | length 585.2
  LT w8: U1.12 U1.11 ; v1(8904,11206) 8902.97,11207.03 U1.11 ; v1(8912,11155) 8899.34,11167.66 U1.10 U1.11
  LB w8: C6.2@8886.41,11097.4 8886.41,11129.41 v1(8912,11155) ; v1(8904,11206) 8919.46,11190.54 C1.2@8964,11190.54 ; L1.2 L1.2@9125,11099.54
  LB w12: C1.2@8964,11190.54 9034,11190.54 L1.2@9125,11099.54
NetC7_2: C7.2 C8.2 C12.2 L2.2 U2.10 U2.11 U2.12 | length 667.1
  LT w8: U2.12 U2.11 U2.10 10041.34,11167.66 v1(10054,11155) ; U2.11 v1(10098,11207)
  LB w8: C12.2@10041.54,11090 10041.54,11142.54 v1(10054,11155) ; v1(10098,11207) 10109.06,11195.94 C7.2@10173.87,11195.94 ; L2.2 10297,11193.54 10299.4,11195.94 C8.2@10303,11199.54
  LB w12: C7.2@10173.87,11195.94 C8.2@10299.4,11195.94
NetJ1_68: J1.68 R3.1 U1.6 | length 1841
  LT w8: R3.1@8607,11169.59 8608.93,11167.66 U1.6 ; v1(8825,12149) 8825,12148.23 8864.69,12108.54 8897.27,12108.54 8959.58,12046.23 J1.68
  LT w12: v1@8440,11179 8452,11167 8604.41,11167 R3.1@8607,11169.59
  LB w12: v1(8438,11177) 8438,11530 8453,11545 8789,11545 8818,11574 8818,12142 v1(8825,12149)
NetJ1_70: J1.70 R5.1 U1.1 | length 1517
  LT w8: R5.1@8613,11289.59 8616.82,11285.77 U1.1 ; v1(8751,12147) 8753.23,12147 8821.69,12078.54 8884.84,12078.54 8928.08,12035.3 J1.70
  LT w12: v1(8495,11578) 8495,11326 8531.41,11289.59 R5.1@8613,11289.59
  LB w12: v1(8495,11578) 8708,11578 8754.61,11624.61 8754.61,12143.39 v1(8751,12147)
NetJ1_72: J1.72 R6.1 U1.17 | length 1183.2
  LT w8: v1(8670,12144) 8670,12143 8765,12048 8872.95,12048 8896.58,12024.37 J1.72 ; U1.17 8785.56,11380.15 R6.1@8804.41,11399
  LT w12: v1(8674,11607) 8674,11591 8804.41,11460.59 R6.1@8804.41,11399
  LB w12: v1(8670,12144) 8663.86,12137.86 8663.86,11617.14 v1(8674,11607)
NetJ1_74: J1.74 R4.1 U1.19 | length 1168.7
  LT w8: v1(8633,12143) 8634.23,12143 8744.23,12033 8854.9,12033 8865.09,12022.81 J1.74 ; U1.19 8746.19,11400.6 R4.1@8746.59,11401
  LT w12: v1(8630,11614) 8630,11571 8746.59,11454.41 R4.1@8746.59,11401
  LB w12: v1(8630,11614) 8633,11614 v1(8633,12143)
NetJ2_37: J2.37 R9.1 U2.6 | length 3293.3
  LT w8: v1(8994,12393) 8994.87,12393 9022.57,12365.3 J2.37 ; R9.1@9788,11167.59 9788.07,11167.66 U2.6
  LT w12: v1(8309,12152) 8309,11840 8431,11718 9424,11718 9570,11572 9570,11257 9659.41,11167.59 R9.1@9788,11167.59
  LB w8: v1(8309,12152) 8315,12152 8371,12208 8371,12393 v1(8994,12393)
NetJ2_39: J2.39 R10.1 U2.19 | length 3162.4
  LT w8: v1(9034,12395) 9054.06,12374.94 J2.39 ; R10.1@9871.46,11416.4 9871.46,11403.54 9896.19,11378.81 U2.19
  LT w12: v1(8344,12246) 8344,11848 8440,11752 9452,11752 9662,11542 9795,11542 9871.46,11465.54 R10.1@9871.46,11416.4
  LB w8: v1(8344,12246) 8344,12418 8982.23,12418 8983.23,12419 9010,12419 v1(9034,12395)
NetJ2_41: J2.41 R11.1 U2.1 | length 2275.1
  LT w8: v1(9075,12395) 9075,12396 9074,12397 9076.12,12397 9085.56,12387.56 J2.41 ; v1(9592,12421) 9600,12413 9600,11800 v1(9868,11532) ; R11.1@9741,11282.59 9744.18,11285.77 U2.1
  LT w12: v1(9618,11286) 9737.59,11286 R11.1@9741,11282.59
  LB w8: v1(9075,12395) 9075,12396 9074,12397 9098,12421 v1(9592,12421)
  LB w12: v1(9618,11286) 9617,11285 9617,11468 9648,11499 9835,11499 v1(9868,11532)
NetJ2_43: J2.43 R12.1 U2.17 | length 1801.2
  LT w8: v1(9114,12395) 9112,12393 9107.67,12393 9117.06,12383.61 J2.43 ; v1(9641,12393) 9639,12391 9639,11799 v1(9951,11487) ; R12.1@9925.41,11417.12 9925.41,11404.59 9936,11394 9936,11325.58 U2.17
  LT w12: R12.1@9925.41,11417.12 9925.41,11461.41 v1(9951,11487)
  LB w8: v1(9114,12395) 9112,12393 v1(9641,12393)
NetR1_1: R1.1 U1.8 | length 64.8
  LT w8: R1.1@8752,11108.59 8765.87,11122.46 U1.8
NetR2_1: R2.1 U1.9 | length 65.1
  LT w8: U1.9 8785.56,11123.03 R2.1@8800,11108.59
NetR7_1: R7.1 U2.8 | length 72.4
  LT w8: R7.1@9903,11100.59 9915.87,11113.46 U2.8
NetR8_1: R8.1 U2.9 | length 72.9
  LT w8: U2.9 9935.56,11118.03 R8.1@9952,11101.59
RESET_IN_N: J2.92 S2.2 | length 1138.7
  LT w8: J2.92 8581.62,12577.62 8627,12623 9417,12623 9453,12659 9453,12758.49 S2.2
RESET_OUT_N: J2.6 P1.5 | length 962.1
  LT w8: P1.5 8291,12747 8291,12283 8491.23,12283 8492.11,12282.12 8513.65,12282.12 8514.53,12283 8534.38,12283 J2.6
SD_CLK: J2.32 J5.5 | length 1001.5
  LT w8: J2.32 8944,12320 v1(8944,12303)
  LB w8: v1@8942,12301 v1(8944,12303)
  LB w12: v1@8942,12301 9122,12301 9173.2,12249.8 9578.2,12249.8 9744.6,12083.4 J5.5
SD_CMD: J2.42 J5.3 | length 889.8
  LT w8: v1(9101.31,12272.31) J2.42
  LB w8: v1@9101,12272 v1(9101.31,12272.31)
  LB w12: v1@9101,12272 9144,12229 9560,12229 9780.4,12008.6 J5.3
SD_DATA0: J2.48 J5.7 | length 771.9
  LT w8: v1(9195.8,12277.8) J2.48
  LB w8: 9779.8,12158.2 J5.7
  LB w12: v1(9195.8,12277.8) 9247,12329 9609,12329 9779.8,12158.2
SD_DATA1: J2.46 J5.8 | length 776.3
  LT w8: v1(9164.3,12303) J2.46
  LB w8: 9779.39,12195.61 J5.8
  LB w12: v1(9164.3,12303) 9219.3,12358 9617,12358 9779.39,12195.61
SD_DATA2: J2.44 J5.1 | length 936.7
  LT w8: v1@9132.8,12208 J2.44
  LB w12: v1(9133,12201) 9166,12168 9540,12168 9767.5,11940.5 9760.8,11933.8 J5.1
SD_DATA3: J2.50 J5.2 | length 825.2
  LT w8: v1@9227.29,12208 J2.50
  LB w12: v1(9227,12196) 9227,12187.58 9237.42,12198 9548,12198 9774.8,11971.2 J5.2
SYS_BOOT0: J2.36 S1.16 | length 1881.5
  LT w8: J2.36 9006.82,12269.2 9121.02,12155 9243.98,12155 9268,12179.02 9268,12282 9480,12494 10349,12494 10388.51,12533.51
  LT w12: 10388.51,12533.51 S1.16
SYS_BOOT1: J2.34 S1.15 | length 1659.8
  LT w8: J2.34 8975.32,12374.91 8968,12382.23 8968,12403.77 8985.66,12421.43 9295.43,12421.43 9408,12534 9826,12534 9944,12652 9944,12752 10272.27,12752 S1.15@10338.51,12685.76
SYS_BOOT3: J2.20 S1.14 | length 2066.7
  LT w8: J2.20 8754.85,12293 8792.85,12255 8995,12255 9118,12132 9279,12132 9309,12162 ; v1@10251,12470 v1(10257,12464) ; S1.14 S1.14@10291,12687.81
  LT w12: 9309,12162 9309,12263 9516,12470 v1@10251,12470 ; v1(10291,12544) S1.14@10291,12687.81
  LB w12: v1(10257,12464) 10291,12498 v1(10291,12544)
SYS_BOOT4: J2.40 S1.13 | length 1714.4
  LT w8: J2.40 9069.81,12227.42 9127.23,12170 9213.79,12170 9215.01,12171.22 9216.23,12170 9237.77,12170 9253,12185.23 9253,12206.77 9251.78,12207.99 9251.78,12300.78 9463,12512 10225,12512 10239,12526
  LT w12: S1.13@10238.51,12671.6 S1.13 10239,12689.81 10239,12526
SYS_BOOT5: J2.89 S1.12 | length 1787.9
  LT w8: J2.89 v1(8628.87,12523.13)
  LT w12: v1@10188.51,12551 S1.12
  LB w12: v1(8628.87,12523.13) 10161.13,12523.13 v1(10189,12551)
UP_A1: J1.48
UP_A2: J1.46
UP_A3: J1.44
UP_A4: J1.42
UP_A5: J1.54
UP_A6: J1.52
UP_A7: J1.50
UP_A8: J1.13
UP_A9: J1.7
UP_A10: J1.38
UP_BUS_CLK: J1.19
UP_D0: J1.35
UP_D1: J1.37
UP_D2: J1.33
UP_D3: J1.39
UP_D4: J1.49
UP_D5: J1.57
UP_D6: J1.55
UP_D7: J1.53
UP_D8: J1.29
UP_D9: J1.31
UP_D10: J1.43
UP_D11: J1.45
UP_D12: J1.41
UP_D13: J1.47
UP_D14: J1.59
UP_D15: J1.63
UP_DREQ: J1.30
UP_IODIR: J1.98
UP_NADV_ALE: J1.23
UP_NBE0: J1.25
UP_NBE1: J1.21
UP_NCS0: J1.9
UP_NCS1: J1.11
UP_NCS2: J1.40
UP_NCS3: J1.36
UP_NCS4: J1.34
UP_NCS5: J1.32
UP_NCS6: J1.28
UP_NOE: J1.15
UP_NWAIT: J1.26
UP_NWE: J1.1
USB1_D_N: C5.2 J3.2 R2.2 | length 522.9
  LT w19: v1(8797.89,10998) 8800,11000.11 R2.2@8800,11057.41
  LB w19: J3.2@8817.26,10648 8817.26,10714 8797.89,10733.37 v1(8797.89,10998) 8855.89,10940 C5.2
USB1_D_P: C4.2 J3.3 R1.2 | length 518
  LT w19: R1.2@8752,11057.41 8752,11003.89 v1(8757.89,10998)
  LB w19: C4.2 8702.89,10943 v1(8757.89,10998) 8757.89,10733.37 8738.52,10714 J3.3@8738.52,10648
USB2_D_N: C11.2 J4.2 R8.2 | length 511.9
  LT w19: v1(9944.89,10973) 9952,10980.11 R8.2@9952,11050.41
  LB w19: J4.2@9964.26,10648 9964.26,10714 9944.89,10733.37 v1(9944.89,10973) 9985.41,10973 C11.2
USB2_D_P: C10.2 J4.3 R7.2 | length 505.9
  LT w19: R7.2@9903,11049.41 9903,10974.89 v1(9904.89,10973)
  LB w19: C10.2 9868.59,10973 v1(9904.89,10973) 9904.89,10733.37 9885.52,10714 J4.3@9885.52,10648
VBUS1: C3.2 J3.1 L1.1 | length 561.7
  LB w12: J3.1@8922,10679 9135,10892 9135,10985.46 9076,10985.46 9125,11034.46 L1.1
VBUS2: C9.2 J4.1 L2.1 | length 577.5
  LB w12: J4.1@10063,10668 10279,10884 10279,10988 C9.2@10227.54,10988 ; C9.2@10225,10985.46 C9.2@10227.54,10988 ; L2.1 10297,11057.46 C9.2@10227.54,10988
VIO_REF_1V8: J2.4 J5.4 R3.2 R4.2 R5.2 R6.2 R9.2 R10.2 R11.2 R12.2 U1.20 U2.20 | length 878.9
  LT w8: v1(8502.88,12308.12) J2.4 ; v1(8535.41,11118.41) R3.2@8607,11118.41 ; v1(8545.59,11238.41) R5.2@8613,11238.41 ; 8653.41,11443 8695.41,11401 8726.5,11369.91 U1.20 ; R6.2@8855.59,11399 8868,11399 8905,11436 v1(8905,11438) ; v1(9754.4,11416.4) 9820.28,11416.4 9820.28,11381.36 U2.20 ; R12.2@9976.59,11417.12 v1(10055.12,11417.12)
  LT w12: v1(9678.41,11231.41) R11.2@9741,11231.41 ; v1(9712.41,11116.41) R9.2@9788,11116.41
  LB w12: J5.4 v1(9894,12046)
  other v1: 9691,11417 8557,11441 8620,11441
pads on no net: fid1.1 fid2.1 J1.2 J1.3 J1.4 J1.5 J1.6 J1.8 J1.10 J1.17 J1.22 J1.24 J1.61 J1.62 J1.73 J1.75 J1.76 J1.77 J1.78 J1.79 J1.80 J1.81 J1.82 J1.83 J1.84 J1.85 J1.86 J1.87 J1.88 J1.89 J1.90 J1.91 J1.92 J1.93 J1.94 J1.95 J1.96 J1.97 J1.99 J2.3 J2.5 J2.7 J2.8 J2.9 J2.10 J2.11 J2.12 J2.13 J2.14 J2.15 J2.16 J2.17 J2.18 J2.19 J2.21 J2.22 J2.23 J2.24 J2.25 J2.26 J2.28 J2.29 J2.31 J2.33 J2.35 J2.38 J2.45 J2.47 J2.49 J2.51 J2.52 J2.53 J2.54 J2.55 J2.56 J2.57 J2.58 J2.60 J2.61 J2.64 J2.67 J2.72 J2.73 J2.74 J2.77 J2.78 J2.79 J2.80 J2.81 J2.82 J2.83 J2.84 J2.85 J2.87 J2.88 J2.90 J2.94 J2.96 J2.98 J2.100 J5. S1.6 S1.7 S1.8 S1.9 S1.10 S1.11 S2.3 S2.4 U1.2 U1.4 U1.5 U1.7 U1.14 U1.15 U1.16 U1.18 U2.2 U2.4 U2.5 U2.7 U2.14 U2.15 U2.16 U2.18

## Polygon pours and split planes (outlines as drawn)
VIO_REF_1V8 on POWER (split plane): 10499.9,10090.1 8150.32,10090.1 8149.1,10091.32 8149.1,13399.9 10499.9,13399.9
D_GND on GND_Plane (split plane): 9500,10565.45 9501.41,10565.26 9502.72,10564.72 9503.85,10563.85 9504.72,10562.72 9505.26,10561.41 9505.45,10560 9505.46,10560 9505.46,10365 9505.45,10365 9505.26,10363.59 9504.72,10362.28 9503.85,10361.15 9502.72,10360.28 9501.41,10359.74 9500,10359.55 9500,10359.54 9186,10359.54 9186,10359.55 9184.59,10359.74 9183.28,10360.28 9182.15,10361.15 9181.28,10362.28 9180.74,10363.59 9180.55,10365 9180.54,10365 9180.54,10560 9180.55,10560 9180.74,10561.41 9181.28,10562.72 9182.15,10563.85 9183.28,10564.72 9184.59,10565.26 9186,10565.45 9186,10565.46 9500,10565.46
D_GND on GND_Plane (split plane): 10499.9,10090.1 8150.32,10090.1 8149.1,10091.32 8149.1,13399.9 10499.9,13399.9

## Keep-outs
LT:
  rectangle: 8129,10070 10517,10090
  rectangle: 10500,10070 10520,13420
  rectangle: 8130,10082 8150,13417
  rectangle: 8133,13400 10521,13420

## Other copper
LT:
  rectangle net VIO_REF_1V8: 8527,11406 8652,11469
  rectangle net VIO_REF_1V8: 9663,11390 9770,11441
  rectangle net MAIN_BATT_3V6: 8514,11772 8601,11859
  rectangle net D_GND: 9034,13095 9097,13363
LB:
  region net D_GND: 10327,12167 10118,12167 10118,11845 10327,11845
  rectangle net MAIN_BATT_3V6: 8425,13098 8564,13323
GND_Plane (plane layer: these items are gaps in the copper):
  lines w1: 9240,10497.5 9446,10497.5 ; 9240,10514.9 9446,10514.9 ; 9180,10365 ccw(c9186,10365) 9186,10359 9500,10359 ccw(c9500,10365) 9506,10365 9506,10560 ccw(c9500,10560) 9500,10566 9186,10566 ccw(c9186,10560) 9180,10560 9180,10365
  text "Layer Stack Up Detail for: TorpedoSOMDevBoard_v1.1.PcbDoc" at 9240,10537.75 h4
  text "Layer" at 9240,10508.4 h4
  text "Name" at 9240,10500.4 h4
  text "LT" at 9240,10484.06 h6
  text "GND_Plane" at 9240,10458.19 h6
  text "POWER" at 9240,10432.31 h6
  text "LB" at 9240,10406.44 h6

## Dimensions
7882,13430 to 7907,10050 on GND_Plane
8120,9975 to 10538,9963 on GND_Plane